# Altium PCB TSAL_Control.PcbDoc (part 2 of 3)
Units mm, origin at the board's own origin, x right, y up, seen from the top; angles counter-clockwise.
Board outline 110 x 55.6 mm, 4 copper layers (Top Layer, GND, PWR, Bottom Layer), stack 1.488 mm thick; 121 components, 67 nets, 352 pads, 66 vias.
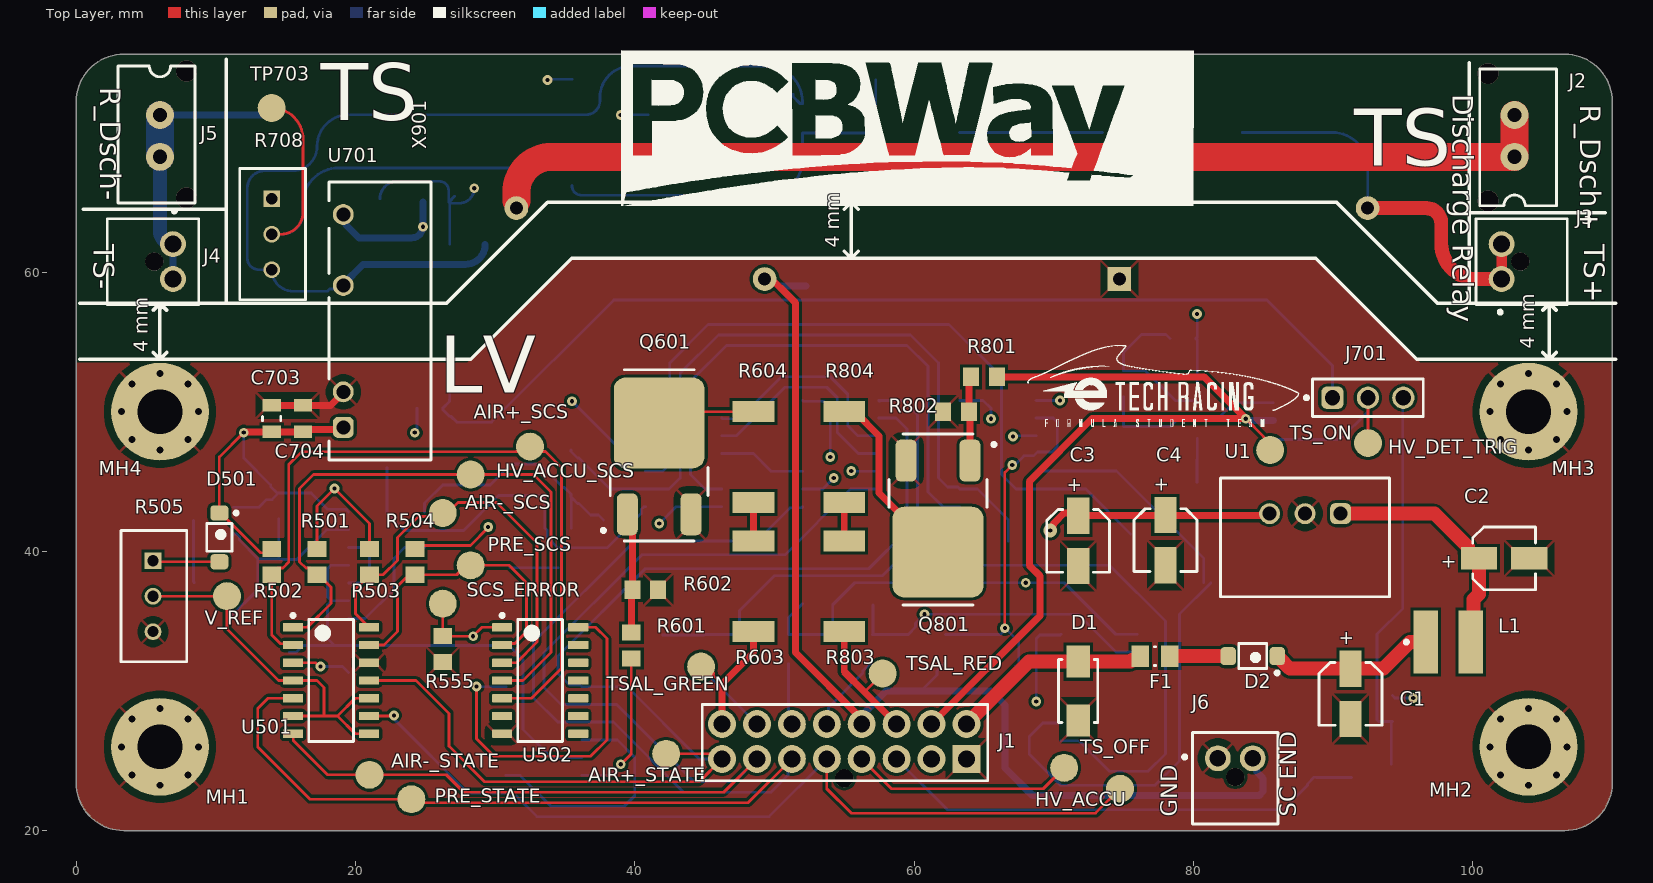
[diagram p0: Top Layer view]

## Part data (continued)
R601 R704 R801: library part CMP-00083-2, "Res Thick Film 0805 100 Ohm 1% 1/8W ±100ppm/°C Molded SMD SMD Paper Tape on Plastic Reel", Case Code (Metric)=2012, Case/Package=0805, Manufacturer 1=Bourns, Manufacturer Part Number 1=CR0805-FX-1000ELF, Max Operating Temperature=155°C, Max Power Dissipation=125mW, Min Operating Temperature=-55°C, Package Quantity=1, Resistance Tolerance=1%, Resistor Type="Thick Film", Temperature Coefficient=100ppm/°C, Voltage Rating=150V, .Creator=DR, Category="Chip SMD Resistors", ComponentLink1Description=https://datasheet.ciiva.com/11809/0900766b80fcdb72-11809178.pdf?src-supplier=RSComponents, ComponentLink1URL=https://datasheet.ciiva.com/11809/0900766b80fcdb72-11809178.pdf?src-supplier=RSComponents, ComponentLink2Description=https://datasheet.ciiva.com/6547/chpreztr-6547413.pdf?src-supplier=Digi-Key, ComponentLink2URL=https://datasheet.ciiva.com/6547/chpreztr-6547413.pdf?src-supplier=Digi-Key, ComponentLink3Description=https://datasheet.ciiva.com/6547/chpreztr-6547414.pdf?src-supplier=Digi-Key, ComponentLink3URL=https://datasheet.ciiva.com/6547/chpreztr-6547414.pdf?src-supplier=Digi-Key, ComponentLink4Description=https://datasheet.ciiva.com/6547/chpreztr-6547415.pdf?src-supplier=Digi-Key, ComponentLink4URL=https://datasheet.ciiva.com/6547/chpreztr-6547415.pdf?src-supplier=Digi-Key, ComponentLink5Description=https://datasheet.ciiva.com/9120/chpreztr-9120744.pdf?src-supplier=Avnet, ComponentLink5URL=https://datasheet.ciiva.com/9120/chpreztr-9120744.pdf?src-supplier=Avnet, Construction=Rectangular, Contact Plating=Tin, Depth=1.25mm, Design Item ID=R100-0805FTK, Features="Moisture Resistant", Height=0.5mm, Length=2mm, Military Standard=Not, Mount="Surface Mount", Number of Terminations=2, Packaging="Tape and Reel", Pins=2, Power rating=125mW, Pricing 1="1=0,05840, 10=0,03430, 25=0,01780, 100=0,00750, 250=0,00560, 500=0,00490, 3000=0,00470 (USD)", Radiation Hardening=No, REACH SVHC="No SVHC", RoHS=Yes, RoHS Compliant=Yes, Series=CR0805, Source=Passives.SchLib, Stock 1=49802, Technology="THICK FILM", Termination=SMD/SMT, Thickness=508um, Tolerance=1%, Voltage Rating (DC)=150V, Width=1.25mm
R603 R604 R803 R804: library part CMP-00075-6, "Res Thick Film 2512 15 Ohm 1% 2W ±100ppm/C Pad SMD T/R", Case Code (Metric)=6432, Case/Package=2512, Manufacturer 1="TE Connectivity", Manufacturer Part Number 1=352115RFT, Max Operating Temperature=155°C, Max Power Dissipation=2W, Min Operating Temperature=-55°C, Number of Resistors=1, Resistance Tolerance=1%, Resistor Type="Thick Film,Power resistor", Temperature Coefficient=100ppm/°C, Voltage Rating=250V, .Creator=DR, Category="Chip SMD Resistors", ComponentLink1Description=Datasheet, ComponentLink1URL=https://docs.rs-online.com/8bc1/0900766b81096b90.pdf, ComponentLink2Description="Where buy it", ComponentLink2URL=https://es.rs-online.com/web/p/resistencias-de-montaje-en-superficie/7551110, ComponentLink3Description=https://datasheet.ciiva.com/25610/0900766b81096b90-25610033.pdf?src-supplier=RSComponents, ComponentLink3URL=https://datasheet.ciiva.com/25610/0900766b81096b90-25610033.pdf?src-supplier=RSComponents, ComponentLink4Description=https://datasheet.ciiva.com/46391/1610601-46391493.pdf?src-supplier=Element14, ComponentLink4URL=https://datasheet.ciiva.com/46391/1610601-46391493.pdf?src-supplier=Element14, ComponentLink5Description=https://datasheet.ciiva.com/7657/1610601-7657542.pdf?src-supplier=Element14, ComponentLink5URL=https://datasheet.ciiva.com/7657/1610601-7657542.pdf?src-supplier=Element14, Depth=3.2mm, Design Item ID=R15-2512FTK, ELV=Compliant, Features="Automotive AEC-Q200", Height=0.55mm, Length=6.3mm, Mount="Surface Mount", Number of Terminations=2, Packaging="Tape and Reel", Pricing 1="10=0,64300, 250=0,62200, 1000=0,60000, 2000=0,55400, 2500=0,52100 (USD)", REACH SVHC="No SVHC", RoHS=Yes, RoHS Compliant=Yes, Series="3521, CGS", Source=Passives.SchLib, Stock 1=1, Technology="THICK FILM", Termination=Solder, Tolerance=1%, Voltage Rating (DC)=250V
R708: library part CMP-00072-1, "Trimmer, Cermet, Rest 10 Kilohms, PCB, 25 Turns, Pwr-Rtg 0.5W, 3296 Series", Color=Blue, Insulation Resistance=1GR, Manufacturer=Bourns, Manufacturer Part Number=3296W-1-103LF, Max Operating Temperature=125°C, Max Power Dissipation=500mW, Min Operating Temperature=-55°C, Package Quantity=50, Resistance Tolerance=10%, Resistor Type=Cermet, Temperature Coefficient=100ppm/°C, .Creator=DO, Category="Variable Resistors and Potentiometers", ComponentLink1Description=https://datasheet.ciiva.com/19454/853572-19454866.pdf?src-supplier=Jameco, ComponentLink1URL=https://datasheet.ciiva.com/19454/853572-19454866.pdf?src-supplier=Jameco, ComponentLink2Description=https://datasheet.ciiva.com/11830/0900766b8069ccf4-11830871.pdf?src-supplier=RSComponents, ComponentLink2URL=https://datasheet.ciiva.com/11830/0900766b8069ccf4-11830871.pdf?src-supplier=RSComponents, ComponentLink3Description=https://datasheet.ciiva.com/29122/447277-da-01-en-trimmer-tht3296w-1-103lf-10k-0-5w-29122362.pdf?src-supplier=Conrad, ComponentLink3URL=https://datasheet.ciiva.com/29122/447277-da-01-en-trimmer-tht3296w-1-103lf-10k-0-5w-29122362.pdf?src-supplier=Conrad, ComponentLink4Description=https://datasheet.ciiva.com/26913/3296w-1-103lf-26913885.pdf?src-supplier=IIIC, ComponentLink4URL=https://datasheet.ciiva.com/26913/3296w-1-103lf-26913885.pdf?src-supplier=IIIC, ComponentLink5Description=https://datasheet.ciiva.com/1131/1815117-1131273.pdf?src-supplier=Element14, ComponentLink5URL=https://datasheet.ciiva.com/1131/1815117-1131273.pdf?src-supplier=Element14, ComponentLink6Description=https://datasheet.ciiva.com/18411/70153578-18411561.pdf?src-supplier=Allied+Electronics, ComponentLink6URL=https://datasheet.ciiva.com/18411/70153578-18411561.pdf?src-supplier=Allied+Electronics, ComponentLink7Description=https://datasheet.ciiva.com/3266/3296-3266187.pdf?src-supplier=Avnet, ComponentLink7URL=https://datasheet.ciiva.com/3266/3296-3266187.pdf?src-supplier=Avnet, ComponentLink8Description=https://datasheet.ciiva.com/30093/3296-30093899.pdf?src-supplier=Onlinecomponents.com, ComponentLink8URL=https://datasheet.ciiva.com/30093/3296-30093899.pdf?src-supplier=Onlinecomponents.com, ComponentLink9Description=https://datasheet.ciiva.com/2156/3296-2156893.pdf?src-supplier=Digi-Key, ComponentLink9URL=https://datasheet.ciiva.com/2156/3296-2156893.pdf?src-supplier=Digi-Key, ComponentLink10Description=https://datasheet.ciiva.com/14173/ew3296-dat-e-14173022.pdf?src-supplier=Distrelec, ComponentLink10URL=https://datasheet.ciiva.com/14173/ew3296-dat-e-14173022.pdf?src-supplier=Distrelec, ComponentLink11Description="Where buy it", ComponentLink11URL=https://es.rs-online.com/web/p/potenciometros-de-ajuste/5219647, Contact Plating=Tin,Matte, Depth=4.83mm, Design Item ID=R10k-VTR, Height=0.395inch, Lead Free="Lead Free", Length=9.53mm, Military Standard=Not, Mount="PCB,Through Hole", Number of Turns=25, Packaging=Rail/Tube, Power rating=500mW, Pricing 1="50=2,54800, 100=2,31900, 200=2,14000, 300=1,88400, 500=1,55300 (USD)", Radiation Hardening=No, REACH SVHC="No SVHC", RoHS=Yes, RoHS Compliant=Yes, Series=3296, Source=Passives.SchLib, Stock 1=3300, Taper=Linear, Technology=CERMET, Termination=Pin, Tolerance=10%, Weight=0.03oz, Width=9.53mm
R709: library part CMP-00108-2, "Current Sense Resistors - SMD 3watts .002ohms 1%", Case Code (Imperial)=2512, Case Code (Metric)=6432, Manufacturer="Vishay Dale", Manufacturer Part Number=WSLP25122L000FEA, Max Operating Temperature=170°C, Min Operating Temperature=-65°C, Package Quantity=2000, Power rating=3W, Resistance=2M, Resistor Type="Metal Strip", Temperature Coefficient=275ppm/°C, Tolerance=1%, Case/Package=2512, Category="Chip SMD Resistors", ComponentLink1Description=https://datasheet.ciiva.com/48527/wslp-48527354.pdf?src-supplier=Avnet, ComponentLink1URL=https://datasheet.ciiva.com/48527/wslp-48527354.pdf?src-supplier=Avnet, Design Item ID=R2M-2512FTK, Height=0.635mm, Lead Free="Lead Free", Length=6.4mm, Mount="Surface Mount", Packaging="Tape and Reel", Pricing 1="1=1,07000, 10=1,07000, 50=1,07000, 100=1,07000, 1000=0,77100, 10000=0,75500 (USD)", RoHS=Yes, RoHS Compliant=Yes, Series=WSLP, Size Code=2512, Source=Passives.SchLib, Stock 1=11994, Termination=SMD/SMT, Weight=0.001429oz, Width=3.2mm
R710: library part CMP-009-00018-4, "Fixed Resistor, Metal Glaze/thick Film, 0.125W, 51000ohm, 150V, 1% +/-Tol, 100ppm/Cel, Surface Mount, 0805. ERJ-6ENF5102V", Case/Package=0805, Max Operating Temperature=155°C, Min Operating Temperature=-55°C, Power=125mW, Tolerance=1%, Mounting Technology="Surface Mount", Pins=2, RoHS Compliant=Yes
U1: library part CMP-019-00006-1, "Switching Regulator 36V In / 12 V Out, 1A. 173011235", RoHS Compliant=Yes
U101 U302: library part CMP-00213-1, "AND Gate, 4000/14000/40000 Series, 3-Func, 3-Input, CMOS, PDSO14", Case/Package=SOP, Load Capacitance (CL)=50pF, Max Operating Temperature=125°C, Max Supply Voltage=18V, Min Operating Temperature=-55°C, Min Supply Voltage=3V, Nominal Supply Voltage=5V, Package Body Material=Plastic, Package Equivalence Code=SOP14,.25, Package Shape=Rectangular, Package Style="SMALL OUTLINEMeter", Peak Reflow Temperature (Cel)=260°C, Power Supplies=5/15V, Temperature Grade=MILITARY, Channels=3, Height - Seated (Max)=1.75mm, JESD-30 Code=R-PDSO-G14, JESD-609 Code=e4, Length=8.65mm, Load/Preset Input=Yes, Logic Type="AND GATE", Moisture Sensitivity Level=1, Number of Inputs=3, Packaging=Rail/Tube, Pins=14, Prop. Delay@Nom-Sup=250ns, Propagation Delay (tpd)=250ns, Qualification Status="Not Qualified", Reach SVHC Compliant=Yes, RoHS Compliant=Yes, Schmitt Trigger=No, Surface Mount=Yes, Technology=CMOS, Terminal Finish=Nickel, Terminal Form="Gull Wing", Terminal Pitch=1.27mm, Terminal Position=DUAL, Width=3.9mm
U201 U502: library part CMP-00217-1, "OR Gate, 4000/14000/40000 Series, 2-Func, 4-Input, CMOS, PDSO14", Case/Package=SOP, Load Capacitance (CL)=50pF, Max Operating Temperature=125°C, Max Supply Voltage=18V, Min Operating Temperature=-55°C, Min Supply Voltage=3V, Nominal Supply Voltage=5V, Package Body Material=Plastic, Package Equivalence Code=SOP14,.25, Package Shape=Rectangular, Package Style="SMALL OUTLINEMeter", Peak Reflow Temperature (Cel)=260°C, Power Supplies=5/15V, Temperature Grade=MILITARY, Channels=2, Height - Seated (Max)=1.75mm, JESD-30 Code=R-PDSO-G14, JESD-609 Code=e4, Length=8.65mm, Logic Type="OR GATE", Moisture Sensitivity Level=1, Number of Inputs=4, Output Characteristics=OPEN-COLLECTOR, Packaging=Rail/Tube, Pins=14, Prop. Delay@Nom-Sup=250ns, Propagation Delay (tpd)=250ns, Qualification Status="Not Qualified", Reach SVHC Compliant=Yes, RoHS Compliant=Yes, Schmitt Trigger=No, Surface Mount=Yes, Technology=CMOS, Terminal Finish=Nickel, Terminal Form="Gull Wing", Terminal Pitch=1.27mm, Terminal Position=DUAL, Width=3.9mm
U202: library part CMP-00211-1, "NAND Gate, 4000/14000/40000 Series, 4-Func, 2-Input, CMOS, PDSO14", Case/Package=SOP, Load Capacitance (CL)=50pF, Max Operating Temperature=125°C, Max Supply Voltage=18V, Min Operating Temperature=-55°C, Min Supply Voltage=3V, Nominal Supply Voltage=5V, Package Body Material=Plastic, Package Equivalence Code=SOP14,.25, Package Shape=Rectangular, Package Style="SMALL OUTLINEMeter", Peak Reflow Temperature (Cel)=260°C, Power Supplies=5/15V, Temperature Grade=MILITARY, Channels=4, Height - Seated (Max)=1.75mm, JESD-30 Code=R-PDSO-G14, JESD-609 Code=e4, Length=8.65mm, Load/Preset Input=Yes, Logic Type="NAND GATE", Moisture Sensitivity Level=1, Number of Inputs=2, Packaging="Tape and Reel", Pins=14, Prop. Delay@Nom-Sup=250ns, Propagation Delay (tpd)=250ns, Qualification Status="Not Qualified", Reach SVHC Compliant=Yes, RoHS Compliant=Yes, Schmitt Trigger=No, Surface Mount=Yes, Technology=CMOS, Terminal Finish=Nickel, Terminal Form="Gull Wing", Terminal Pitch=1.27mm, Terminal Position=DUAL, Width=3.9mm